# Altium PCB IMU V1.PcbDoc (part 2 of 2)
Units mm, origin at the board's own origin, x right, y up, seen from the top; angles counter-clockwise.
Board outline 100 x 100 mm, 2 copper layers (Top Layer, Bottom Layer); 99 components, 85 nets, 461 pads, 189 vias.
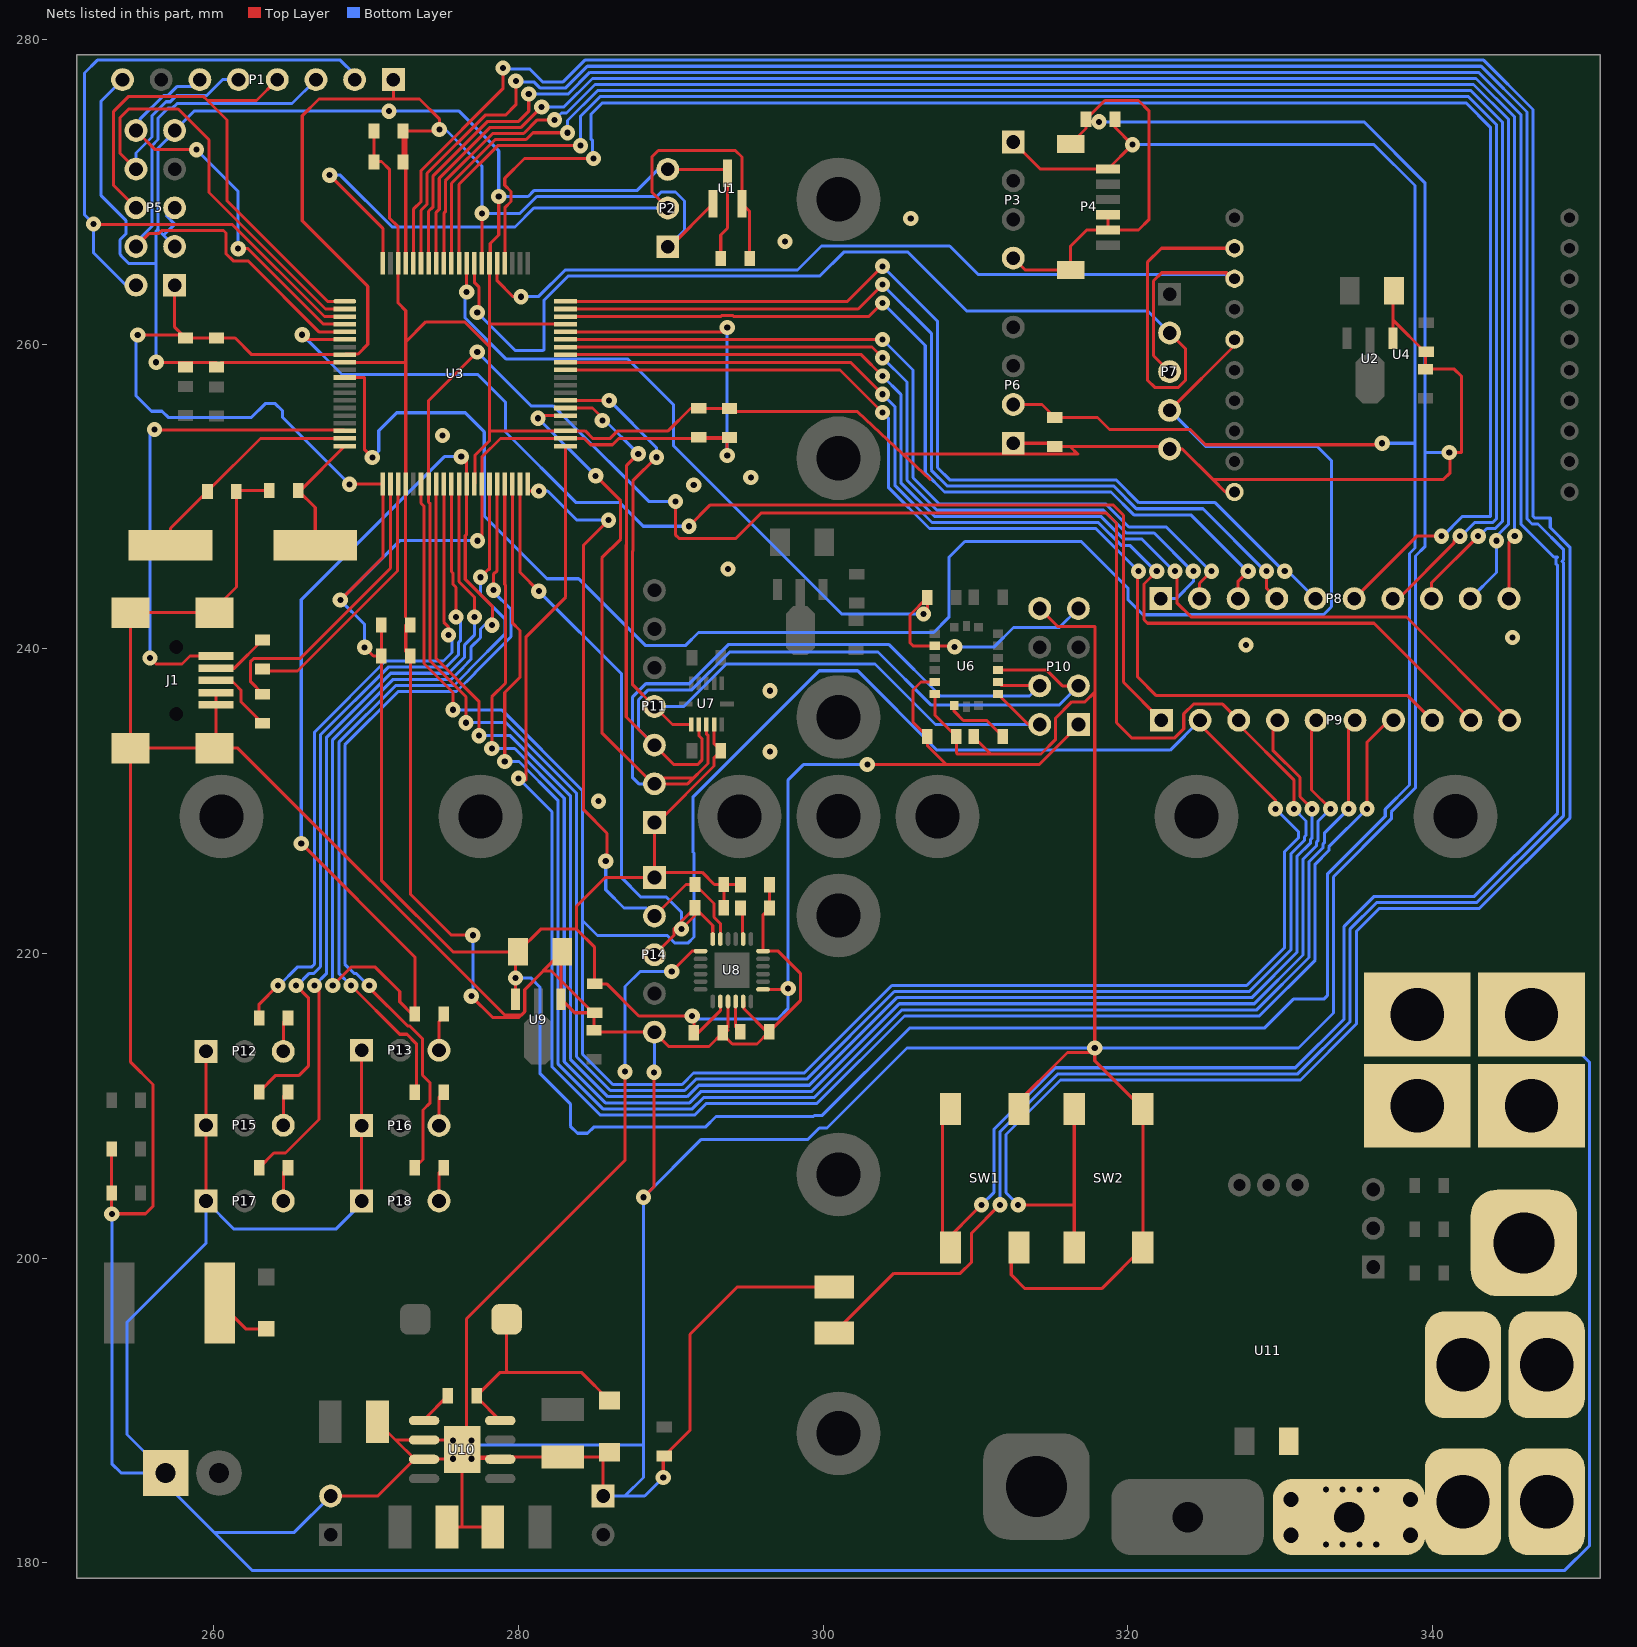
[diagram p2: the nets of this part, all layers, seen from the top]

## Via types
v1: diameter 1, hole 0.4, Top Layer to Bottom Layer, 177 vias
v2: diameter 2, hole 1, Top Layer to Bottom Layer, 8 vias
v3: diameter 1, hole 0.4, Top Layer to Bottom Layer, tented top, 4 vias

## Nets (pads, with @x,y where several pads share a name; then routed paths per layer and width w, separated by ;. In a path a pad name is that pad's centre, name@x,y a point inside that pad or via, vN(x,y) a via of type N, cw(c..) or ccw(c..) an arc to the next point about the centre after c; other vN are vias at no path point) (continued)
JTAG_3V3: C1.2 C2.2 C3.2 C6.2 C7.2 C12.2 C13.2 C14.2 C20.2 C23.2 C24.2 C25.2 C27.2 C29.2 C30.2 C32.2 P1.1 P2.1 P3.1 P4.A1 P5.1 P6.2 P10.1 P11.1 P14.1 R4.1 R5.1 U1.1 U3.8 U3.21 U3.34 U3.42 U3.56 U3.67 U3.77 U6.5 U7.10 U8.8 U8.13 U9.3 | length 496.1
  Top Layer w0.2: v1(255,260.6) C6.2@257.947,260.6 ; P5.1@257.424,263.875 257.424,261.123 C6.2@257.947,260.6 ; v1(268.3,243.2) 271.094,245.994 U3.21@271.094,250.814 268.914,250.814 v1(268.9,250.8) ; v1(269.9,240.1) 270.467,239.533 C23.2@270.994,239.533 ; C20.2@270.994,241.565 C23.2@270.994,239.533 ; 271.78,276.18 P1.1@271.78,277.368 ; C3.2@272.414,271.971 C1.2@272.414,274.003 ; U3.77@272.594,265.314 272.594,273.823 C1.2@272.414,274.003 ; v1(277.3,247.1) 277.594,247.394 277.594,252.594 278.814,253.814 284.305,253.814 284.719,253.399 286.162,253.399 286.577,253.814 C13.2@293.784,253.814 ; U3.67@277.594,265.314 v1(277.594,268.594) ; U9.3@279.799,217.001 v1(279.799,218.4) 279.799,219.942 279.965,219.942 C29.2@279.965,220.109 ; U3.56@283.094,260.814 293.414,260.814 v1(293.7,261.1) ; P2.1@289.8,266.4 289.95,266.4 U1.1@292.766,269.216 ; C12.2@291.827,253.886 C13.2@293.84,253.886 ; U7.10@292.836,235.038 292.836,233.765 C24.2@293.286,233.315 292.836,232.865 292.836,232.305 289.131,228.6 P11.1@288.92,228.6 P14.1@288.92,224.996 ; U8.8@293.25,216.85 293.25,216.25 291.801,214.801 C32.2@291.51,214.801 291.51,215.79 v1(291.4,215.9) 287.9,215.9 285.789,218.011 C30.2@284.996,218.011 284.996,220.404 283.8,221.6 ; R5.1@293.482,223.008 R4.1@293.482,224.532 ; v1(293.7,252.7) 293.7,253.731 C13.2@293.784,253.814 ; C13.2@293.848,253.878 C13.2@293.784,253.814 ; C27.2@294.574,224.513 294.555,224.532 R4.1@293.482,224.532 ; U8.13@296.05,217.65 297.65,217.65 v1(297.7,217.7) ; v1(302.9,232.4) 308.1,232.4 ; U6.5@307.329,237.824 306.424,237.824 305.9,237.3 305.9,235.191 C25.2@306.842,234.249 306.842,233.658 308.1,232.4 ; P6.2@312.48,256.04 314.359,256.04 C14.2@315.209,255.19 318.01,255.19 318.8,254.4 324.1,254.4 325.101,253.399 331.299,253.399 ; P3.1@312.48,273.272 314.252,271.5 P4.A1@318.699,271.5 ; P10.1@316.756,235.032 316.756,234.99 314.166,232.4 308.1,232.4 ; P4.A1@318.699,271.5 v1(320.3,273.1) 319.158,274.242 C2.2@319.158,274.767 ; 331.598,253.399 331.299,253.399 ; v1(336.7,253.5) 336.599,253.399 331.299,253.399 ; C6.2@257.947,260.6 C6.2@258.141,260.406 C7.2@260.173,260.406 261.394,260.406 262.486,259.314 U3.8@268.594,259.314 268.644,259.364 269.468,259.364 270.1,259.996 270.1,263.8 265.8,268.1 265.8,275 266.9,276.1 273.5,276.1 274.8,274.8 v1(274.8,274.1) 274.703,274.003 C1.2@272.414,274.003 ; C23.2@270.994,239.533 270.994,224.806 275.691,220.109 C29.2@279.965,220.109 ; C29.2@279.965,220.109 281.457,221.6 283.8,221.6 ; 283.8,221.6 283.8,223.1 285.696,224.996 P14.1@288.92,224.996 ; P14.1@288.92,224.996 289.256,225.332 292.056,225.332 292.856,224.532 R4.1@293.482,224.532
  Bottom Layer w0.2: v1(255,260.6) 254.9,260.5 254.9,256.6 255.9,255.6 256.597,255.6 256.998,255.199 262.468,255.199 263.369,256.1 264.031,256.1 264.5,255.631 264.5,255.2 v1(268.9,250.8) ; v1(269.9,240.1) 269.9,241.6 v1(268.3,243.2) 272.2,247.1 v1(277.3,247.1) ; v1@274.325,274.003 274.422,274.1 v1(274.8,274.1) 275.2,274.1 277.594,271.706 v1(277.594,268.594) 280.094,268.594 281.2,269.7 289.075,269.7 289.365,269.99 290.31,269.99 290.9,269.4 290.9,267.5 P2.1@289.8,266.4 ; v1(279.799,218.4) 280.8,218.4 281.4,217.8 281.4,212.134 283.4,210.134 283.4,208.669 283.869,208.2 284.531,208.2 284.931,208.6 292.266,208.6 292.966,209.3 299.369,209.3 299.419,209.35 299.916,209.35 305.666,215.1 328.966,215.1 330.866,217 332.866,217 333.1,217.234 333.1,225.203 336.9,229.003 336.9,229.466 338.494,231.06 338.494,235.751 338.49,235.755 338.49,246.256 338.85,246.616 338.85,253.5 ; v1(291.4,215.9) 291.6,215.7 297,215.7 297.7,216.4 v1(297.7,217.7) 297.7,231.4 298.7,232.4 v1(302.9,232.4) ; v1(293.7,252.7) v1(293.7,261.1) ; v1(320.3,273.1) 336.166,273.1 338.85,270.416 338.85,253.5 ; v1(336.7,253.5) 338.85,253.5
JTAG_GND: C1.1 C2.1 C3.1 C4.1 C5.1 C6.1 C7.1 C8.1 C11.1 C12.1 C13.1 C14.1 C15.2 C16.2 C20.1 C23.1 C25.1 C26.2 C27.1 C28.1 C29.1 C30.1 C31.1 C32.1 C33.1 C34.1 C38.1 C39.1 C41.1 C42.1 D2.2 D3.1 J1.4 J1.5 J1.6 J1.7 J1.8 J1.9 P1.8 P2.3 P3.4 P4.0 P4.A4 P4.A5 P5.3 P5.5 P5.9 P6.1 P7.5 P10.8 P12.1 P13.1 P14.5 P15.1 P16.1 P17.1 P18.1 P20.2 P21.1 P22.1 pad.0@346,201 pad.2@339,210 pad.2@339,216 pad.2@346.5,210 pad.2@346.5,216 R11.2 R15.2 SW1.2 SW1.3 SW2.2 SW2.3 U1.3 U2.1 U3.9 U3.24 U3.33 U3.43 U3.57 U3.66 U3.78 U4.10 U6.6 U8.1 U8.9 U8.11 U8.18 U9.1 U10.2 U10.3 U10.6 U10.9 | length 1039.6
  Top Layer w0.2: R11.2@253.286,207.163 C34.1@253.286,204.275 v1@253.286,202.914 ; v1(253.3,202.9) v1@253.286,202.914 ; v1(256.21,258.814) C7.1@260.173,258.814 ; P17.1@259.475,203.75 P15.1@259.475,208.725 P12.1@259.475,213.575 ; J1.6@260.034,233.478 J1.7@254.534,233.478 ; J1.4@260.134,237.128 J1.5@260.134,236.328 260.134,233.578 260.034,233.578 260.135,233.477 261.572,233.477 279.073,215.976 280.213,215.976 280.416,216.179 280.416,217.627 281.635,218.846 282.161,218.846 284.946,216.061 C31.1@284.946,214.963 285.073,214.836 P14.5@288.92,214.836 289.856,213.9 292.509,213.9 C32.1@293.41,214.801 293.41,214.69 294.039,214.061 295.658,214.061 C33.1@296.458,214.861 ; C7.1@260.481,258.814 272.58,258.814 ; C16.2@263.642,250.389 261.528,250.389 C15.2@261.478,250.339 261.478,244.056 260.034,242.612 J1.8@260.034,242.378 J1.9@254.534,242.378 J1.7@254.534,233.478 ; P20.2@267.664,184.38 270.757,184.38 273.17,186.793 U10.3@273.197,186.793 ; P18.1@269.7,203.75 P16.1@269.7,208.7 P13.1@269.7,213.65 ; C1.1@270.514,274.003 C3.1@270.514,271.971 270.543,272 271,272 271.514,271.486 271.514,268.286 272.094,267.706 272.094,262.706 272.594,262.206 U3.24@272.594,250.814 ; C38.1@270.738,189.252 271.927,188.063 ; 272.593,242.084 U3.24@272.594,250.814 ; C20.1@272.594,241.565 272.594,239.833 C23.1@272.894,239.533 272.894,223.906 275.6,221.2 v1(277,221.2) ; 272.594,260.148 273.914,261.468 276.454,261.468 278.094,259.827 ; C41.1@275.31,182.348 276.3,182.348 ; U10.9@276.581,188.347 276.581,196.012 286.995,206.426 v1(286.995,212.242) ; v3(276.9,186.828) 276.914,186.842 278.751,186.842 U10.6@278.8,186.793 ; v1(276.9,217.2) 278.3,215.8 280.022,215.8 280.4,216.178 280.4,217.643 C29.1@282.799,220.042 ; U3.33@277.094,250.814 277.144,250.864 277.144,252.71 278.094,253.66 U3.66@278.094,265.314 278.144,265.364 278.144,266.614 278.7,267.17 v1(278.7,269.7) ; 278.108,261.314 U3.57@283.094,261.314 ; 278.18,254.314 284.37,254.314 284.885,253.799 285.996,253.799 286.511,254.314 289.823,254.314 291.295,255.786 ; C42.1@278.306,182.348 276.3,182.348 ; C29.1@282.865,220.109 C29.1@282.799,220.042 ; C30.1@284.996,216.111 283.69,216.111 U9.1@282.799,217.001 C29.1@282.799,220.042 ; P21.1@285.552,184.38 285.552,186.832 D3.1@285.674,186.954 ; v1(288.2,204) 288.9,204.7 v1(288.9,212.2) ; v1(289.5,185.6) 289.5,186.95 R15.2@289.56,187.01 291.25,188.7 291.25,195 294.346,198.096 D2.2@300.736,198.096 ; P2.3@289.8,271.48 293.452,271.48 U1.3@293.716,271.216 293.716,267.616 293.274,267.174 C4.1@293.274,265.619 ; v1(290.06,218.821) 291.389,220.15 U8.1@291.95,220.15 ; C12.1@291.978,255.778 C13.1@293.848,255.778 ; C32.1@293.41,214.96 293.75,214.96 293.66,215.051 293.75,215.141 U8.9@293.75,216.85 ; C13.1@293.848,255.575 302.252,255.575 305.243,252.781 307.01,251.13 ; U8.11@294.75,216.85 294.8,216.8 294.8,216.364 296.303,214.861 C33.1@296.458,214.861 ; C27.1@296.474,224.513 C28.1@296.474,222.989 296.05,222.565 U8.18@296.05,220.15 297.05,220.15 298.5,218.7 298.5,216.903 C33.1@296.458,214.861 ; 305.359,252.781 316.713,252.781 316.203,253.29 ; U6.6@307.329,237.034 307.329,235.662 C25.1@308.742,234.249 308.742,233.158 ; 308.8,233.1 311,233.1 ; C26.2@309.89,234.249 309.89,234.21 311,233.1 ; SW1.3@312.348,200.704 312.348,198.902 313.25,198 318.28,198 SW2.3@320.984,200.704 SW2.2@320.984,209.804 317.83,212.958 v1(317.83,213.792) ; SW1.2@312.348,209.804 316.044,213.5 317.538,213.5 v1(317.83,213.792) ; P6.1@312.48,253.5 314.999,253.5 C14.1@315.209,253.29 316.203,253.29 ; P3.4@312.48,265.652 313.257,264.875 P4.0@316.249,264.875 316.249,266.449 317.3,267.5 P4.A5@318.699,267.5 ; P10.8@314.216,242.652 315.4,241.468 317.832,241.468 317.832,237.163 317.83,237.161 ; P4.0@316.249,273.15 317.258,274.158 C2.1@317.258,274.767 318.491,276 320.7,276 321.4,275.3 321.4,268.2 320.7,267.5 P4.A5@318.699,267.5 ; P4.A4@318.699,268.5 P4.A5@318.699,267.5 ; P7.5@322.574,253.29 316.203,253.29 ; P7.5@322.744,253.12 323.58,253.12 325.57,251.13 ; U4.10@326.401,250.299 325.57,251.13 ; U2.1@337.399,260.401 337.399,263.441 C5.1@337.466,263.508 ; 337.466,261.541 339.547,259.46 C11.1@339.547,258.362 341.438,258.362 341.9,257.9 341.9,252.9 341.159,252.9 341.159,251.56 340.73,251.13 325.57,251.13 ; v1@253.286,202.914 255.514,202.914 256,203.4 256,211.4 254.534,212.866 J1.7@254.534,233.478 ; 271.927,188.063 U10.3@273.197,186.793 ; 271.927,188.063 U10.2@273.8,188.063 275.665,188.063 v3(275.7,188.028) U10.9@276.3,187.428 ; U10.3@273.197,186.793 U10.3@273.8,186.793 273.835,186.828 v3(275.7,186.828) U10.9@276.3,187.428 ; 276.3,182.348 U10.9@276.3,187.428 ; U10.9@276.3,187.428 276.774,186.954 C39.1@282.904,186.954 D3.1@285.674,186.954 ; D3.1@285.674,186.954 D3.1@285.972,187.252 D3.1@285.674,186.954 ; 311,233.1 314.3,233.1 315.266,234.066 315.266,235.466 316.322,236.522 317.191,236.522 317.83,237.161 ; v1(317.83,213.792) 317.83,237.161
  Bottom Layer w0.2: v1(253.3,202.9) 253.3,186.5 253.908,185.892 P22.1@256.832,185.892 ; P1.8@254,277.368 252.6,275.968 252.6,269.754 254.222,268.132 254.222,267.237 253.834,266.85 253.834,265.914 253.9,265.849 253.9,265.8 254.4,265.3 256.2,265.3 ; v1@256.2,258.5 256.2,265.3 ; 256.89,268.42 257.424,267.885 256.689,267.15 ; P5.3@257.424,266.415 256.689,267.15 ; P20.2@267.664,184.38 265.284,182 260,182 ; P18.1@269.7,203.75 269.7,203.6 268,201.9 261.325,201.9 P17.1@259.475,203.75 259.475,200.975 254.3,195.8 254.3,188.424 P22.1@256.832,185.892 ; v3(276.9,188.028) 277.197,187.731 288.188,187.731 ; v1(276.9,217.2) 277,217.3 v1(277,221.2) ; P21.1@285.552,184.38 286.98,184.38 ; v1(286.995,212.242) 286.995,217.83 287.985,218.821 v1(290.06,218.821) ; v1@288.92,212.22 P14.5@288.92,214.836 ; v1(289.5,185.6) 288.28,184.38 286.98,184.38 ; P2.3@289.8,271.48 289.18,271.48 287.8,270.1 281.034,270.1 280.634,269.7 v1(278.7,269.7) 278.7,272.7 276.1,275.3 v1(271.5,275.3) 258.69,275.3 P5.9@257.424,274.035 257.424,273.958 256.334,272.868 256.334,267.574 256.3,267.539 ; v1(318.099,274.599) 335.501,274.599 339.5,270.6 339.5,252.9 ; 338.89,235.921 338.89,246.09 339.5,246.7 339.5,252.9 ; 338.894,235.917 338.894,230.894 337.3,229.3 337.3,228.837 333.5,225.037 333.5,216.1 331.2,213.8 305.497,213.8 300.247,208.55 299.75,208.55 299,207.8 292,207.8 v1(288.2,204) 288.2,185.6 286.98,184.38 ; v1(341.1,252.9) 339.5,252.9 ; pad.2@346,217 pad.2@346.174,217 ; pad.2@347.174,216 350.3,212.874 350.3,181.108 348.692,179.5 262.5,179.5 260,182 ; 256.2,265.3 256.2,267.439 256.3,267.539 ; 256.3,267.539 256.689,267.15 ; P22.1@256.832,185.892 256.832,185.168 260,182
  other v1: 285.25,230 296.5,233.25 296.5,237.25 327.75,240.25 345.25,240.75 293.75,245.25 291.5,250.75 295.25,251.25 275,254 297.5,266.75 305.75,268.25
JTAG_RESETX: P1.6 P5.10 U3.4 | length 27
  Top Layer w0.2: P5.10@254.884,274.035 256.149,272.771 v1(258.851,272.771) ; v1(261.595,266.272) 262.235,266.272 267.193,261.314 U3.4@268.594,261.314
  Bottom Layer w0.2: P5.10@254.884,274.035 255.134,274.285 255.134,274.766 256.687,276.318 256.975,276.318 257.565,276.908 258.62,276.908 P1.6@259.08,277.368 ; v1(258.851,272.771) 261.595,270.027 v1(261.595,266.272)
JTAG_TCLK_SWCLKX: P1.3 P5.4 U3.5 | length 38.1
  Top Layer w0.2: P5.4@254.884,266.415 255.728,267.259 256.362,267.259 256.568,267.465 260.633,267.465 260.795,267.304 260.795,266.604 260.795,265.941 261.263,265.472 262.235,265.472 266.893,260.814 U3.5@268.594,260.814
  Bottom Layer w0.2: P5.4@254.884,266.415 254.884,266.689 255.934,267.739 255.934,273.034 256.334,273.434 256.334,274.834 257.018,275.518 257.306,275.518 257.588,275.8 265.132,275.8 P1.3@266.7,277.368
JTAG_TDIX: P1.5 P5.8 U3.2 | length 36.9
  Top Layer w0.2: P5.8@254.884,271.495 253.822,272.557 253.822,274.853 254.406,275.438 257.658,275.438 259.674,273.421 259.674,269.966 267.327,262.314 U3.2@268.594,262.314
  Bottom Layer w0.2: P5.8@254.884,271.495 254.884,272.55 255.934,273.6 255.934,275 256.852,275.918 257.141,275.918 257.541,276.318 259.515,276.318 260.565,277.368 P1.5@261.62,277.368
JTAG_TDO_SWOX: P1.4 P5.6 U3.1 | length 36.4
  Top Layer w0.2: P5.6@254.884,268.955 253.416,270.423 253.416,275.285 254.406,276.276 259.309,276.276 259.584,276 ; P1.4@264.16,277.368 262.792,276 259.584,276 ; U3.1@268.594,262.814 267.462,262.814 260.858,269.418 260.858,274.726 259.584,276
JTAG_TMS_SWDIOX: P1.2 P5.2 U3.3 | length 53.6
  Top Layer w0.2: v1(252.1,267.9) 252.135,267.865 261.208,267.865 267.259,261.814 U3.3@268.594,261.814
  Bottom Layer w0.2: P5.2@254.884,263.875 254.225,263.875 252.1,266 v1(252.1,267.9) 251.5,268.5 251.5,277.8 252.35,278.65 268.3,278.65 269.24,277.71 P1.2@269.24,277.368
NetC15_1: C15.1 U3.19 Y1.1 | length 15
  Top Layer w0.2: Y1.1@257.154,246.804 257.154,247.915 C15.1@259.578,250.339 263.053,253.814 U3.19@268.594,253.814
NetC16_1: C16.1 U3.20 Y1.2 | length 8.3
  Top Layer w0.2: Y1.2@266.654,246.804 266.654,249.277 C16.1@265.542,250.389 265.669,250.389 U3.20@268.594,253.314
NetC26_1: C26.1 U6.7 | length 4.3
  Top Layer w0.2: U6.7@308.599,236.285 308.599,235.901 309.2,235.3 310.739,235.3 C26.1@311.79,234.249
NetC28_2: C28.2 U8.20 | length 2.1
  Top Layer w0.2: C28.2@294.574,222.989 294.7,222.863 294.7,221 U8.20@294.75,220.95
NetC33_2: C33.2 U8.10 | length 2.1
  Top Layer w0.2: U8.10@294.25,216.85 294.25,215.169 C33.2@294.558,214.861
NetC37_1: C37.1 U10.1 | length 2.3
  Top Layer w0.2: U10.1@273.8,189.333 273.8,189.409 C37.1@275.35,190.959
NetC37_2: C37.2 D3.2 L1.1 U10.8 | length 15.9
  Top Layer w0.2: U10.8@278.8,189.333 277.25,190.883 C37.2@277.25,190.959 278.791,192.5 279.3,192.5 ; L1.1@279.22,195.984 279.22,192.58 279.3,192.5 ; D3.2@285.972,190.652 284.124,192.5 279.3,192.5
NetC40_1: C40.1 pad.1 pad.2@342,193 pad.2@347.5,193 U11.5
  other v1: 333.007,181.204 334.107,181.204 335.207,181.204 336.307,181.204 333.007,184.804 334.107,184.804 335.207,184.804 336.307,184.804
  other v2: 330.707,181.804 338.557,181.804 330.707,184.154 338.557,184.154
NetD1_1: D1.1 F1.2 | length 3.8
  Top Layer w0.2: F1.2@260.384,197.06 262.084,195.36 D1.1@263.444,195.36
NetJ1_2: J1.2 R2.1 | length 3.8
  Top Layer w0.2: J1.2@260.134,238.728 261.342,238.728 R2.1@263.192,240.578
NetJ1_3: J1.3 R3.1 | length 4.7
  Top Layer w0.2: J1.3@260.134,237.928 261.158,237.928 261.584,237.502 261.584,237.488 261.772,237.3 261.772,236.542 R3.1@263.192,235.122
NetP12_3: P12.3 R6.1 | length 2.3
  Top Layer w0.2: P12.3@264.555,213.575 264.555,215.445 R6.1@264.869,215.759
NetP13_3: P13.3 R7.1 | length 2.5
  Top Layer w0.2: P13.3@274.78,213.65 274.78,215.52 275.094,215.834 R7.1@275.094,216.034
NetP15_3: P15.3 R9.1 | length 2.3
  Top Layer w0.2: P15.3@264.555,208.725 264.555,210.595 R9.1@264.869,210.909
NetP16_3: P16.3 R10.1 | length 2.3
  Top Layer w0.2: P16.3@274.78,208.7 274.78,210.57 R10.1@275.094,210.884
NetP17_3: P17.3 R12.1 | length 2.3
  Top Layer w0.2: P17.3@264.555,203.75 264.555,205.62 R12.1@264.869,205.934
NetP18_3: P18.3 R13.1 | length 2.3
  Top Layer w0.2: P18.3@274.78,203.75 274.78,205.62 R13.1@275.094,205.934
R\E\S\E\T\: P7.4 U3.11 U4.5 | length 117.1
  Top Layer w0.2: U3.11@268.594,257.814 269.9,257.814 269.9,253.068 v1(270.4,252.569) ; P7.4@322.744,255.66 326.999,259.915 U4.5@326.999,260.299
  Bottom Layer w0.2: v1(270.4,252.569) 270.822,252.991 270.822,254.322 272,255.5 276.5,255.5 277.75,254.25 277.75,248.75 277.733,248.733 281.864,244.602 283.947,244.602 288.315,240.233 290.982,240.233 291.821,241.071 307.249,241.071 308.25,242.072 308.25,246 309.3,247.05 316.95,247.05 320,244 320,243.24 321,242.24 332.842,242.24 333.375,242.773 333.375,252.349 332.435,253.289 325.115,253.289 P7.4@322.744,255.66
SCK: P10.2 P11.4 U3.47 U6.9 U7.7 | length 60.1
  Top Layer w0.2: U3.47@283.094,256.314 v1(285.95,256.314) ; v1(289.052,252.578) 287.502,251.028 287.502,246.438 287.47,246.406 287.47,237.67 P11.4@288.92,236.22 290.102,235.038 U7.7@291.336,235.038 ; U6.9@311.47,237.034 313.473,235.032 P10.2@314.216,235.032
  Bottom Layer w0.2: v1(285.95,256.314) 289.052,253.212 v1(289.052,252.578) ; P11.4@288.92,236.22 290.851,236.22 293.631,239 303.4,239 307.368,235.032 P10.2@314.216,235.032
SCL: P14.2 R4.2 U3.40 U8.23 | length 43.9
  Top Layer w0.2: U3.40@280.594,250.814 280.594,250.368 v1(281.33,250.368) ; v1(285.725,226.06) 285.813,226.149 285.813,227.891 284.277,229.428 284.277,246.825 v1(285.902,248.45) ; P14.2@288.92,222.456 290.996,224.532 R4.2@291.582,224.532 292.832,223.282 292.832,222.384 293.25,221.966 U8.23@293.25,220.95
  Bottom Layer w0.2: v1(281.33,250.368) 281.915,250.368 283.832,248.45 v1(285.902,248.45) ; v1(285.725,226.06) 285.725,224.18 286.918,222.987 288.389,222.987 P14.2@288.92,222.456
SDA: P14.3 R5.2 U3.39 U8.24 | length 43.1
  Top Layer w0.2: U3.39@280.094,250.814 280.094,245.026 v1(281.33,243.789) ; P14.3@288.92,219.916 290.2,221.196 290.2,221.626 R5.2@291.582,223.008 ; v1(290.703,221.615) 291.582,222.494 R5.2@291.582,223.008 ; U8.24@292.75,220.95 292.75,221.84 R5.2@291.582,223.008
  Bottom Layer w0.2: v1(281.33,243.789) 286.766,238.354 286.766,224.968 288.011,223.723 289.687,223.723 290.703,222.707 v1(290.703,221.615)
SERVOSIG1: R6.2 U3.29 | length 43.3
  Top Layer w0.2: R6.2@262.969,215.759 262.969,216.669 v1(264.2,217.9) ; U3.29@275.094,250.814 275.094,241.75 275.394,241.45 v1(275.394,240.909)
  Bottom Layer w0.2: v1(264.2,217.9) 264.269,217.9 265.469,219.1 266.4,219.1 266.6,219.3 266.6,234.528 271.272,239.2 275.069,239.2 275.634,239.766 275.634,240.669 v1(275.394,240.909)
SERVOSIG2: R9.2 U3.30 | length 49.6
  Top Layer w0.2: R9.2@262.969,210.909 264.06,212 265.6,212 266.2,212.6 266.2,217.1 v1(265.4,217.9) ; U3.30@275.594,250.814 275.594,245.069 275.694,244.969 275.694,244.243 275.9,244.037 v1(275.9,242.1)
  Bottom Layer w0.2: v1(265.4,217.9) 265.469,217.9 266.269,218.7 266.566,218.7 267,219.134 267,234.363 271.437,238.8 275.234,238.8 276.066,239.631 276.066,240.431 276.2,240.566 276.2,241.8 v1(275.9,242.1)
SERVOSIG3: R12.2 U3.31 | length 54.1
  Top Layer w0.2: R12.2@262.969,205.934 263.935,206.9 264.7,206.9 266.9,209.1 266.9,217.6 v1(266.6,217.9) ; U3.31@276.094,250.814 276.094,244.409 277.1,243.403 v1(277.1,242.1)
  Bottom Layer w0.2: v1(266.6,217.9) 267.4,218.7 267.4,234.197 271.603,238.4 275.4,238.4 276.466,239.466 276.466,240.266 277.1,240.9 v1(277.1,242.1)
SERVOSIG4: R7.2 U3.32 | length 95.5
  Top Layer w0.2: v1(265.735,227.228) 273.194,219.769 R7.2@273.194,216.034 ; v1(267.8,217.9) 269,219.1 270.6,219.1 272.2,217.5 272.2,216.828 273.094,215.934 R7.2@273.194,215.834 ; v1(276.238,252.616) 276.594,252.259 U3.32@276.594,250.814 276.594,247.525 276.5,247.431 276.5,244.569 278.3,242.769 278.3,241.603 v1(278.253,241.556)
  Bottom Layer w0.2: v1(265.735,227.228) 265.735,243.225 275.125,252.616 v1(276.238,252.616) ; v1(267.8,217.9) 267.8,234.031 271.769,238 275.597,238 276.349,238.751 276.349,238.783 276.866,239.3 276.866,240.1 277.5,240.734 277.5,241.3 278.253,242.053 v1(278.253,241.556)
SERVOSIG5: R10.2 U3.35 | length 50.1
  Top Layer w0.2: v1(269,217.9) 272.2,214.7 272.675,214.7 273.29,214.085 273.29,210.98 R10.2@273.194,210.884 ; v1(277.5,244.7) 278,245.2 278.094,245.2 278.094,246.763 278.1,246.769 278.1,250.808 U3.35@278.094,250.814
  Bottom Layer w0.2: v1(269,217.9) 268.2,218.7 268.2,233.866 271.934,237.6 275.763,237.6 276.749,238.586 276.749,238.617 279.1,240.969 279.1,241.969 277.5,243.569 v1(277.5,244.7)
SERVOSIG6: R13.2 U3.36 | length 55
  Top Layer w0.2: v1(270.2,217.9) 270.2,217.754 272.72,215.234 272.866,215.234 273.69,214.41 273.69,212.01 274.2,211.5 274.2,210.2 273.73,209.73 273.73,206.47 R13.2@273.194,205.934 ; v1(278.349,243.851) 278.349,244.889 278.594,245.134 U3.36@278.594,250.814
  Bottom Layer w0.2: v1@270.131,217.9 269.331,218.7 269.2,218.7 268.6,219.3 268.6,233.7 272.1,237.2 275.928,237.2 277.149,238.42 277.149,238.451 279.5,240.803 279.5,242.597 v1@278.349,243.749
"SPI MISO": P10.3 P11.3 U3.46 U6.11 U7.8 | length 74
  Top Layer w0.2: U3.46@283.094,255.814 284.85,255.814 285.547,255.118 285.499,255.07 v1(285.499,254.999) ; v1(287.858,252.806) 287.102,252.05 287.102,246.838 287.07,246.806 287.07,235.53 P11.3@288.92,233.68 290.2,232.4 291.745,232.4 292.036,232.691 292.036,234.115 291.836,234.315 U7.8@291.836,235.038 ; U6.11@311.47,238.614 311.479,238.622 314.651,238.622 315.701,237.572 P10.3@316.756,237.572
  Bottom Layer w0.2: v1(285.499,254.999) 285.499,255.07 285.547,255.118 v1(287.858,252.806) ; P11.3@288.92,233.68 287.87,234.73 287.87,236.655 288.525,237.31 291.376,237.31 293.866,239.8 303.6,239.8 307.1,236.3 315.484,236.3 P10.3@316.756,237.572
"SPI MOSI": P10.4 P11.2 U3.45 U6.10 U7.9 | length 80.3
  Top Layer w0.2: v1(281.28,255.143) 281.451,255.314 U3.45@283.094,255.314 ; v1(285.064,251.358) 286.702,249.72 286.702,247.206 285.471,245.974 285.471,234.493 288.441,231.522 288.92,231.522 291.488,231.522 292.436,232.47 ; P11.2@288.92,231.14 291.106,231.14 292.436,232.47 292.436,234.281 292.336,234.381 U7.9@292.336,235.038 ; 292.336,234.44 292.436,234.34 ; U6.10@311.47,237.824 311.685,237.609 314.179,237.609 P10.4@314.216,237.572
  Bottom Layer w0.2: v1(281.28,255.143) v1(285.064,251.358) ; P11.2@288.92,231.14 287.9,231.14 287.47,231.57 287.47,236.821 288.359,237.71 291.21,237.71 293.8,240.3 304.3,240.3 307.7,236.9 313.544,236.9 P10.4@314.216,237.572
"TEMP ANALOG": C4.2 P2.2 U1.2 U3.80 | length 48.3
  Top Layer w0.2: v1(267.6,271.1) 271.094,267.606 U3.80@271.094,265.314 ; P2.2@289.8,268.94 288.747,269.993 288.747,272.288 289.179,272.72 294.234,272.72 294.666,272.288 U1.2@294.666,269.216 295.174,268.708 C4.2@295.174,265.619
  Bottom Layer w0.2: v1(267.6,271.1) 268.3,271.1 271.7,267.7 279.766,267.7 281.006,268.94 P2.2@289.8,268.94
TP1: P9.1 U3.6 | length 78.5
  Top Layer w0.2: v1(265.796,260.623) 266.105,260.314 U3.6@268.594,260.314 ; v1(291.186,248.05) 292.589,249.453 319.024,249.453 319.71,248.768 319.71,237.81 P9.1@322.204,235.316
  Bottom Layer w0.2: v1(265.796,260.623) 268.412,258.008 277.324,258.008 279.139,256.192 279.139,254.236 283.756,249.618 286.617,249.618 288.185,248.05 v1(291.186,248.05)
TP2: P9.2 U3.26 | length 178
  Top Layer w0.2: U3.26@273.594,250.814 273.594,249.568 273.794,249.368 273.794,239.037 275.7,237.131 v1(275.7,236) ; P9.2@324.444,235.316 324.594,235.166 329.7,230.06 v1(329.7,229.5)
  Bottom Layer w0.2: v1(275.7,236) 278.893,236 284.2,230.693 ; P9.2@324.744,235.316 322.778,233.35 307.477,233.35 302.263,238.564 299.737,238.564 291.44,230.267 291.44,226.67 291.516,226.593 291.516,221.082 291.109,220.675 290.271,220.675 289.763,221.183 285.185,221.183 284.2,222.169 284.2,230.693 ; v1(329.7,229.5) 331.2,228 331.2,227.594 330.3,226.694 330.3,220.394 327.806,217.9 304.506,217.9 298.756,212.15 291.49,212.15 290.74,211.4 286.194,211.4 284.2,213.394 284.2,230.693
TP3: P9.3 U3.27 | length 195
  Top Layer w0.2: v1(276.549,235.151) 276.549,236.849 274.194,239.203 274.194,249.534 274.094,249.634 274.094,256.289 v1(277.292,259.486) ; v1(290.297,249.682) 290.297,247.498 290.551,247.244 294.259,247.244 295.935,248.92 318.592,248.92 319.253,248.26 319.253,235.153 320.243,234.163 323.088,234.163 323.672,234.747 323.672,235.737 324.307,236.372 326.228,236.372 P9.3@327.284,235.316 ; P9.3@326.984,235.316 327.134,235.166 330.9,231.4 v1(330.9,229.5)
  Bottom Layer w0.2: v1(276.549,235.151) 279.176,235.151 283.8,230.527 283.8,213.228 286.028,211 290.906,211 291.656,211.75 298.922,211.75 304.672,217.5 327.972,217.5 330.7,220.228 330.7,226.528 331.6,227.428 331.6,227.663 331.7,227.763 331.7,228.7 v1(330.9,229.5) ; v1(277.292,259.486) 280.822,255.956 282.27,255.956 283.238,254.988 288.544,249.682 v1(290.297,249.682)
TP4: P9.4 U3.28 | length 112.3
  Top Layer w0.2: U3.28@274.594,250.814 274.594,239.369 277.397,236.566 v1(277.397,234.303) ; P9.4@329.824,235.316 329.524,235.316 329.524,233.342 331.3,231.566 331.3,230.3 v1(332.1,229.5)
  Bottom Layer w0.2: v1(277.397,234.303) 279.459,234.303 283.4,230.362 283.4,213.063 285.863,210.6 291.072,210.6 291.822,211.35 299.087,211.35 304.837,217.1 328.137,217.1 331.1,220.063 331.1,226.363 332,227.263 332,227.497 332.1,227.597 v1(332.1,229.5)
TP5: P9.5 U3.37 | length 111.8
  Top Layer w0.2: v1(278.246,233.454) 278.246,236.849 279.149,237.752 279.149,244.183 279.094,244.237 U3.37@279.094,250.814 U3.37@279.1,250.808 ; P9.5@332.364,235.316 332.064,235.316 332.064,230.736 v1(333.3,229.5)
  Bottom Layer w0.2: v1(278.246,233.454) 279.742,233.454 283,230.196 283,212.897 285.697,210.2 291.237,210.2 291.987,210.95 299.253,210.95 305.003,216.7 328.303,216.7 331.5,219.897 331.5,226.197 332.4,227.097 332.4,227.331 332.5,227.431 332.5,228.7 v1(333.3,229.5)
TP6: P9.6 U3.38 | length 112.4
  Top Layer w0.2: v1(279.094,232.606) 279.094,237.131 280.1,238.137 280.1,241.2 279.594,241.706 U3.38@279.594,250.814 ; v1(334.5,229.5) 334.5,235.212 P9.6@334.604,235.316 ; P9.6@334.552,235.316 P9.6@334.604,235.316 ; P9.6@334.904,235.316 P9.6@334.604,235.316
  Bottom Layer w0.2: v1(279.094,232.606) 280.024,232.606 282.6,230.03 282.6,212.731 285.531,209.8 291.403,209.8 292.153,210.55 299.419,210.55 305.169,216.3 328.469,216.3 331.9,219.731 331.9,226.031 332.8,226.931 332.8,227.166 332.9,227.266 332.9,227.9 v1(334.5,229.5)
TP7: P9.7 U3.41 | length 117.1
  Top Layer w0.2: v1(279.999,231.5) 280.099,231.4 280.5,231.4 280.5,240.8 283.094,243.394 U3.41@283.094,253.314 ; v1(335.7,229.5) 335.7,233.872 337.144,235.316 P9.7@337.444,235.316
  Bottom Layer w0.2: v1(279.999,231.5) 282.2,229.299 282.2,212.566 285.366,209.4 291.569,209.4 292.319,210.15 299.584,210.15 305.334,215.9 328.634,215.9 332.3,219.566 332.3,225.866 333.2,226.766 333.2,227 v1(335.7,229.5)
TP8: P9.8 U3.51 | length 73.2
  Top Layer w0.2: U3.51@283.094,258.314 301.1,258.314 v1(303.9,255.514) ; v1(320.7,245.1) 320.65,245.05 320.65,238.15 321.869,236.931 338.369,236.931 P9.8@339.984,235.316
  Bottom Layer w0.2: v1(303.9,255.514) 304.3,255.114 304.3,250.575 306.975,247.9 317.9,247.9 v1(320.7,245.1)
TP9: P9.9 U3.52 | length 75.3
  Top Layer w0.2: U3.52@283.094,258.814 301.8,258.814 v1(303.9,256.714) ; v1(321.9,245.1) 321.056,244.256 321.056,241.919 321.294,241.681 336.159,241.681 P9.9@342.524,235.316
  Bottom Layer w0.2: v1(303.9,256.714) 304.7,255.914 304.7,250.74 307.14,248.3 318.066,248.3 319.566,246.8 320.131,246.8 321.831,245.1 v1(321.9,245.1)
TP10: P9.10 U3.53 | length 76.5
  Top Layer w0.2: U3.53@283.094,259.314 302.5,259.314 v1(303.9,257.914) ; v1(323.1,245.1) 323.215,244.985 323.215,243.027 324.155,242.087 338.293,242.087 P9.10@345.064,235.316
  Bottom Layer w0.2: v1(303.9,257.914) 305.1,256.714 305.1,250.906 307.306,248.7 318.231,248.7 319.731,247.2 320.931,247.2 323.031,245.1 v1(323.1,245.1)
TP11: P8.1 U3.54 | length 54.4
  Top Layer w0.2: U3.54@283.094,259.814 303.2,259.814 v1(303.9,259.114)
  Bottom Layer w0.2: v1(303.9,259.114) 305.5,257.514 305.5,251.072 307.472,249.1 318.397,249.1 319.897,247.6 321.731,247.6 324.231,245.1 v1(324.3,245.1) 324.3,244.417 323.179,243.296 P8.1@322.16,243.296
TP12: P8.2 U3.55 | length 55
  Top Layer w0.2: U3.55@283.094,260.314 283.108,260.3 303.886,260.3 v1(303.9,260.314) ; P8.2@324.7,243.296 324.7,244.3 v1(325.5,245.1)
  Bottom Layer w0.2: v1(303.9,260.314) 305.9,258.314 305.9,251.237 307.637,249.5 318.563,249.5 320.063,248 322.531,248 325.431,245.1 v1(325.5,245.1)
TP13: P8.3 U3.58 | length 59.5
  Top Layer w0.2: U3.58@283.094,261.814 293.283,261.814 293.369,261.9 294.031,261.9 294.117,261.814 303,261.814 v1(303.9,262.714) ; P8.3@327.24,243.296 327.24,244.44 v1(327.9,245.1)
  Bottom Layer w0.2: v1(303.9,262.714) 306.7,259.914 306.7,251.569 307.969,250.3 318.894,250.3 320.394,248.8 324.131,248.8 327.831,245.1 v1(327.9,245.1)
TP14: P8.4 U3.59 | length 61.8
  Top Layer w0.2: U3.59@283.094,262.314 302.3,262.314 v1(303.9,263.914) ; v1(329.1,245.1) 329.1,243.976 P8.4@329.78,243.296
  Bottom Layer w0.2: v1(303.9,263.914) 307.1,260.714 307.1,251.734 308.134,250.7 319.06,250.7 320.56,249.2 324.931,249.2 329.031,245.1 v1(329.1,245.1)
TP15: P8.5 U3.60 | length 64.8
  Top Layer w0.2: U3.60@283.094,262.814 301.6,262.814 v1(303.9,265.114)
  Bottom Layer w0.2: v1(303.9,265.114) 307.5,261.514 307.5,251.9 308.3,251.1 319.225,251.1 320.725,249.6 325.731,249.6 330.231,245.1 v1(330.3,245.1) 330.516,245.1 P8.5@332.32,243.296
TP16: P8.6 U3.64 | length 112
  Top Layer w0.2: U3.64@279.094,265.314 279.1,265.32 279.1,268.969 279.5,269.369 279.5,270.031 279.094,270.437 279.094,270.894 280.387,272.187 v1(284.913,272.187) ; P8.6@334.86,243.296 338.964,247.4 v1(340.6,247.4)
  Bottom Layer w0.2: v1(284.913,272.187) 284.864,272.236 284.864,273.367 284.749,273.483 284.749,275.086 285.513,275.85 342.2,275.85 343.8,274.25 343.8,248.7 341.969,248.7 340.669,247.4 v1(340.6,247.4)
TP17: P8.7 U3.70 | length 112.5
  Top Layer w0.2: U3.70@276.094,265.314 276.094,270.494 278.636,273.036 v1(284.064,273.036) ; P8.7@337.4,243.296 337.769,243.296 341.401,246.928 341.401,247.091 341.71,247.4 v1(341.8,247.4)
  Bottom Layer w0.2: v1(284.064,273.036) 284.064,274.967 285.347,276.25 342.366,276.25 344.2,274.416 344.2,248.534 343.966,248.3 342.769,248.3 341.869,247.4 v1(341.8,247.4)
TP18: P8.8 U3.71 | length 111.7
  Top Layer w0.2: U3.71@275.594,265.314 275.594,270.56 278.47,273.436 280.504,273.436 280.953,273.884 v1(283.216,273.884) ; P8.8@339.94,243.296 339.94,244.34 v1(343,247.4)
  Bottom Layer w0.2: v1(283.216,273.884) 283.216,274.684 285.181,276.65 342.531,276.65 344.6,274.581 344.6,248.369 344.131,247.9 343.569,247.9 343.069,247.4 v1(343,247.4)
TP19: P8.9 U3.72 | length 111.3
  Top Layer w0.2: U3.72@275.094,265.314 275.094,268.591 275.194,268.691 275.194,270.725 278.304,273.836 280.339,273.836 281.236,274.733 v1(282.367,274.733)
  Bottom Layer w0.2: v1(282.367,274.733) 282.816,275.181 283.147,275.181 285.016,277.05 342.697,277.05 345,274.747 345,248.2 344.2,247.4 v1(344.2,247.1) 344.2,245.016 P8.9@342.48,243.296
TP20: P8.10 U3.73 | length 111.8
  Top Layer w0.2: U3.73@274.594,265.314 274.594,268.657 274.794,268.857 274.794,270.891 278.139,274.236 280.173,274.236 v1(281.519,275.581) ; P8.10@345.02,243.296 345.02,247.02 v1(345.4,247.4)
  Bottom Layer w0.2: v1(281.519,275.581) 282.981,275.581 284.85,277.45 342.863,277.45 345.4,274.913 v1(345.4,247.4)
TP21: D2.1 U3.75 | length 201.1
  Top Layer w0.2: U3.75@273.594,265.314 273.594,268.788 273.994,269.188 273.994,271.222 277.807,275.036 279.139,275.036 279.822,275.719 v1(279.822,277.278) ; D2.1@300.736,195.096 304.64,199 309,199 309.75,199.75 309.75,201.65 v1(311.6,203.5) v1@312,203.5
  Bottom Layer w0.2: v1(279.822,277.278) 279.87,277.23 281.001,277.23 281.401,276.83 283.099,276.83 284.519,278.25 343.194,278.25 346.2,275.244 346.2,248.534 346.534,248.2 346.931,248.2 348.617,246.514 348.617,245.867 348.5,245.75 348.617,245.633 348.617,229.051 342.916,223.35 336.334,223.35 334.6,221.616 334.6,215.534 331.166,212.1 315.416,212.1 311.6,208.284 v1(311.6,203.5)
TP22: SW2.1 SW2.4 U3.76 | length 200.2
  Top Layer w0.2: U3.76@273.094,265.314 273.094,268.854 273.594,269.354 273.594,271.388 278.973,276.767 v1(278.973,278.127) ; v1(312.8,203.5) 316.484,203.5 ; SW2.4@316.484,200.704 316.484,203.5 ; SW2.1@316.484,209.804 316.484,203.5
  Bottom Layer w0.2: v1@279.022,278.078 280.719,278.078 281.567,277.23 282.933,277.23 284.353,278.65 343.36,278.65 346.6,275.41 346.6,248.7 346.7,248.6 347.731,248.6 347.731,247.966 349.017,246.68 349.017,228.886 343.081,222.95 336.5,222.95 335,221.45 335,215.369 331.331,211.7 315.581,211.7 312,208.119 312,204.3 v1(312.8,203.5)
TP23: SW1.1 SW1.4 U3.74 | length 195.9
  Top Layer w0.2: U3.74@274.094,265.314 274.094,268.722 274.394,269.022 274.394,271.057 277.973,274.636 280.007,274.636 280.67,275.299 v1(280.67,276.43) ; SW1.1@307.848,209.804 307.848,200.948 v1(310.4,203.5)
  Bottom Layer w0.2: v1(280.67,276.43) 283.264,276.43 284.684,277.85 343.028,277.85 345.8,275.078 345.8,248.2 347.967,246.033 348.217,246.033 348.1,245.916 348.1,245.584 348.217,245.467 348.217,229.217 342.75,223.75 336.169,223.75 334.2,221.781 334.2,215.7 331,212.5 315.25,212.5 311.2,208.45 311.2,204.3 v1(310.4,203.5)
TRIGPRESS: P10.7 R1.2 U3.69 U6.2 | length 60.3
  Top Layer w0.2: v1(276.594,263.423) U3.69@276.594,265.314 ; v1(306.578,242.291) 306.842,242.555 R1.2@306.842,243.368 305.7,242.226 305.7,240.4 305.907,240.193 U6.2@307.329,240.193 308.693,240.193 v1(308.634,240.134)
  Bottom Layer w0.2: v1(276.594,263.423) 276.492,263.321 276.492,261.722 279.197,259.016 287.185,259.016 290.17,256.032 290.17,253.33 301.209,242.291 v1(306.578,242.291) ; v1(308.634,240.134) 311.234,240.134 312.5,241.4 315.504,241.4 P10.7@316.756,242.652
"UART MISO": P7.3 U3.65 U4.3 | length 64.6
  Top Layer w0.2: U3.65@278.594,265.314 278.594,264.16 279.635,263.119 v1(280.162,263.119) ; P7.3@322.744,258.2 321.691,259.253 321.691,264.16 322.224,264.693 326.499,264.693 326.499,264.299 U4.3@326.999,264.299
  Bottom Layer w0.2: v1(280.162,263.119) 281.299,263.119 283.058,264.877 298.315,264.877 299.884,266.446 308.305,266.446 310.159,264.592 326.707,264.592 U4.3@326.999,264.299
"UART MOSI": P7.2 U3.68 U4.2 | length 76.9
  Top Layer w0.2: U3.68@277.094,265.314 277.094,264.059 277.419,263.735 277.419,262.204 v1(277.292,262.077) ; P7.2@322.744,260.74 323.799,259.685 323.799,257.658 323.291,257.15 321.793,257.15 321.285,257.658 321.285,265.379 322.205,266.299 U4.2@326.999,266.299
  Bottom Layer w0.2: v1(277.292,262.077) 279.781,259.588 281.618,259.588 281.686,259.656 281.686,262.903 283.261,264.477 299.783,264.477 301.346,266.04 305.562,266.04 309.423,262.179 321.305,262.179 P7.2@322.744,260.74
USB-VBUS: J1.1 U3.18 | length 32.5
  Top Layer w0.2: v1@255.828,239.528 255.8,239.5 v1(255.8,239.4) 256.2,239 257.9,239 258.428,239.528 J1.1@260.134,239.528 ; v1(256.1,254.4) 256.136,254.364 268.544,254.364 U3.18@268.594,254.314
  Bottom Layer w0.2: v1(255.8,239.4) 255.8,254.1 v1(256.1,254.4)
V_USB_N: R2.2 U3.23 | length 17.4
  Top Layer w0.2: R2.2@263.192,238.678 263.324,238.546 265.488,238.546 272.048,245.106 272.048,249.654 272.094,249.7 U3.23@272.094,250.814
V_USB_P: R3.2 U3.22 | length 19.7
  Top Layer w0.2: R3.2@263.192,237.022 263.192,237.074 262.392,237.874 262.392,239.152 262.596,239.357 265.657,239.357 271.594,245.294 U3.22@271.594,250.814
pads on no net: J1.MH1 J1.MH2 P4.A6 P5.7 U3.13 U3.14 U3.15 U3.16 U4.4 U4.6 U4.7 U4.8 U4.9 U4.11 U4.12 U4.13 U4.14 U4.15 U4.16 U4.17 U4.18 U4.19 U4.20 U6.4 U6.20 U6.21 U7.1 U7.6 U7.11 U7.12 U8.2 U8.3 U8.4 U8.5 U8.6 U8.7 U8.14 U8.15 U8.16 U8.17 U8.19 U8.21 U8.22 U8.25 U10.5

## Polygon pours and split planes (outlines as drawn)
JTAG_GND on Bottom Layer "Top Layer-No Net" (solid, remove dead copper, pour order 1001): 251,179 351,179 351,279 251,279
NetC37_2 on Top Layer "Top Layer-No Net" (solid, remove dead copper): 276.581,189 279.5,189 279.5,189.75 280.5,190.75 285.75,190.75 286.75,191.75 286.75,192.75 282,197.5 276.5,197.5
JTAG_GND on Top Layer "Top Layer-No Net" (solid, remove dead copper, pour order 1000): 251,179 351,179 351,279 251,279

## Keep-outs
Keep-Out Layer:
  the board outline again, w0.1

## Other copper
Top Layer:
  rectangle net 11V1-UF: 306.5,180 329,197
  region net NetC40_1: 350.5,197 329.5,197 329.5,180 350.5,180
  region net JTAG_GND: 341.5,197.5 350.5,197.5 350.5,224 335,224 335,206 341.5,206

## Silkscreen, mask and mechanical layers (free items; w line width, h text height)
Top Overlay:
  lines w0.1: 275.5,277.5 274,277.5 ; 274,277.5 275,278 275,277 274,277.5 ; 251.25,202 251.25,214 256.75,214 256.75,202 251.25,202 ; 257.5,200.5 276.5,200.5 276.5,216 271.5,221 262.5,221 257.5,216 257.5,200.5
  text "ZigBee (Pro)" at 334,277 h2
  text "3v3" at 315,272.5 h1.25 r90
  text "GND" at 286.25,271.25 h1.25
  text "TX" at 315,270.25 h1.25 r90
  text "JTAG/SWD" at 259.8,269.8 h2 r45
  text "GPS" at 310,269 h2 r90
  text "Aout" at 286.25,268.75 h1.25
  text "RX" at 315,267.5 h1.25 r90
  text "3V3" at 286.75,266 h1.25
  text "GND" at 315,264.75 h1.25 r90
  text "3v3" at 319.78,263 h1.25
  text "PWM" at 314.5,260.75 h1.25
  text "TX" at 320.032,260.5 h1.25
  text "Analog" at 314.5,258.25 h1.25
  text "RX" at 319.979,257.75 h1.25
  text "3v3" at 314.5,255.75 h1.25
  text "RST" at 319.436,255.25 h1.25
  text "MaxSonar" at 310,254 h2 r90
  text "GND" at 319.25,252.75 h1.25
  text "GND" at 314.25,251.75 h1.25
  text "Analog 3v3" at 296.5,245 h1.25
  text "TP21" at 347,245 h2
  text "GND" at 285.5,243.5 h1.25
  text "Acc. 3-axis" at 290.75,242 h1.25
  text "INT" at 286,241 h1.25
  text "TP11" at 320,240 h2
  text "TP20" at 344,240 h2
  text "Ext. IO" at 331,239 h2
  text "CS1" at 285.75,238.25 h1.25
  text "SCK" at 285.5,235.75 h1.25
  text "MISO" at 285,233.25 h1.25
  text "TP23" at 350,233 h2 r90
  text "TP1" at 320,232 h2
  text "TP10" at 344,232 h2
  text "Baro Sens" at 310.75,231 h1.25
  text "MOSI" at 285,230.75 h1.25
  text "USB" at 252.5,230 h2.5
  text "3V3" at 285.75,228.25 h1.25
  text "Mini" at 252.5,228 h2.5
  text "3V3" at 287.25,224.25 h1.25 r90
  text "KeaDrone IMU V2" at 307.25,222.25 h3
  text "SCL" at 287.25,221.75 h1.25 r90
  text "- by WNPD.nl" at 309.237,220 h2.5
  text "ESC -" at 340.75,219.25 h3
  text "Servo In/Out" at 263.5,219 h2
  text "SDA" at 287.25,219 h1.25 r90
  text "PWR 3v3" at 280.5,218 h1.25
  text ".Print_Date" at 310.25,217.75 h2.5
  text "INT" at 287.25,217 h1.25 r90
  text ".Print_Time" at 310.25,215.75 h2.5
  text "GND" at 287.25,214 h1.25 r90
  text "Batt. Voltage" at 251.5,212.75 h1.25
  text "Gyro 3-axis" at 291.5,211.75 h1.25
  text "Battery -" at 342,205 h3
  text "3V3" at 332.75,204.25 h1.25
  text "Aout" at 332.5,201.75 h1.25
  text "GND" at 258.775,201 h1.25
  text "5v0" at 261.275,201 h1.25
  text "Sig" at 264.025,201 h1.25
  text "GND" at 269,201 h1.25
  text "5v0" at 271.5,201 h1.25
  text "Sig" at 274.25,201 h1.25
  text "GND" at 332,199 h1.25
  text "SMPS 5V-1A" at 281,194 h2
  text "(-)" at 254.5,193 h2 r180
  text "(+)" at 264,193 h2 r180
  text "PWR Input" at 255,192 h2
  text "Battery +" at 311,189.5 h3
  text "ESC +" at 342.5,187.5 h3
  text "GND" at 269.25,184 h1.25
  text "GND" at 282,184 h1.25
  text "PWR 5v" at 265.5,180 h2 r90
  text "PWR Input" at 288.5,180 h2 r90
Top Solder:
  rectangle: 308.5,180 318.5,197
  region: 341.5,197.5 350.5,197.5 350.5,224 335,224 335,206.5 341.5,206.5
  region: 334.5,197 334.5,185.5 339.5,185.5 339.5,180 350.5,180 350.5,197

## Text inside footprints (layer, text, board x,y; h text height)
J1: Mechanical 1 "PCB Edge" at 251.852,241.964 h0.25 r270
P5: Top Overlay "2" at 255.392,261.335 h1.27 r90; Top Overlay "1" at 257.932,261.843 h1.27 r90
P10: Top Overlay "8" at 315.25,244.25 h1.27 r90; Top Overlay "7" at 318,244.25 h1.27 r90; Top Overlay "1" at 317.264,233 h1.27 r90; Top Overlay "2" at 314.724,232.492 h1.27 r90
U7: Top Overlay "Z" at 296.486,235.638 h1.25 r270; Top Overlay "Y" at 294.486,236.638 h1.25 r270; Top Overlay "X" at 296.986,234.388 h1.25 r270
U8: Top Overlay "Z" at 298.8,219.25 h1.25; Top Overlay "Y" at 297.3,219.75 h1.25; Top Overlay "X" at 299.55,217.5 h1.25